# Altium PCB imu_evo.PcbDoc (part 2 of 2)
Units mil, origin at the board's own origin, x right, y up, seen from the top; angles counter-clockwise.
Board outline 2362.2 x 1574.8 mil, 3 copper layers (Top Layer, Mid-Layer 1, Bottom Layer); 55 components, 35 nets, 218 pads, 127 vias.
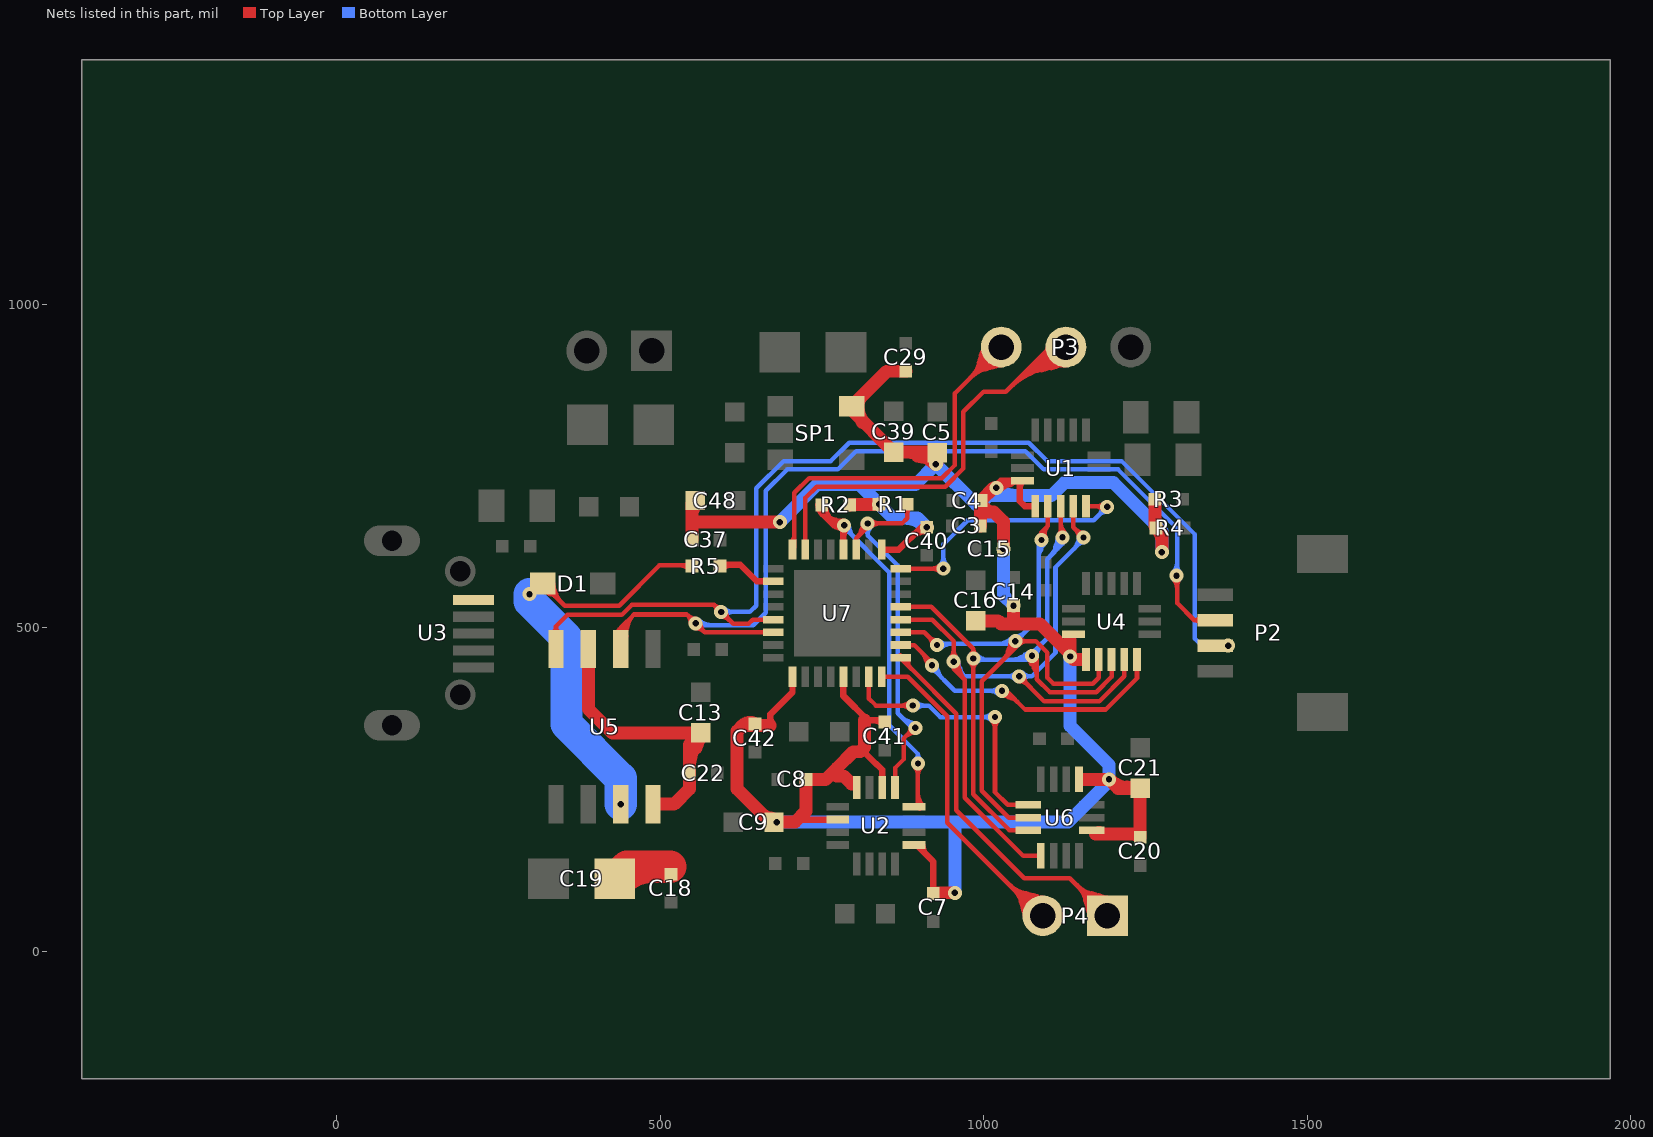
[diagram p2: the nets of this part, all layers, seen from the top]

## Via types
v1: diameter 21.65, hole 9.84, Top Layer to Bottom Layer, tented both sides, 119 vias
v2: diameter 196.85, hole 125.98, Top Layer to Bottom Layer, tented both sides, 4 vias
v3: diameter 21.65, hole 9.84, Top Layer to Bottom Layer, 3 vias
v4: diameter 118.11, hole 78.74, Top Layer to Bottom Layer, tented both sides, 1 vias

## Nets (pads, with @x,y where several pads share a name; then routed paths per layer and width w, separated by ;. In a path a pad name is that pad's centre, name@x,y a point inside that pad or via, vN(x,y) a via of type N, cw(c..) or ccw(c..) an arc to the next point about the centre after c; other vN are vias at no path point) (continued)
RX: P2.3 U5.2 U7.30 | length 2120.9
  Top Layer w7: U5.2@438.4,486.3 ccw(c420.39,511) 450.6,506.27 ; U5.2@439.17,467.52 439.17,500.2 ; 443.06,501.84 ccw(c458.61,499.4) U5.2@445.89,490.13 ; 545.18,516.63 ccw(c557.81,520.01) v1@555.18,507.21 ; 545.38,516.83 cw(c541.99,504.2) v1@554.8,506.82 ; v1@555.05,506.57 cw(c552.43,493.77) 565.06,497.15 ; v1@555.44,506.95 ccw(c568.24,509.58) 564.86,496.95 ; U7.30@675.2,493.11 568.9,493.11 v1(555.12,506.89) 541.34,520.67 459.65,520.67 ; v1(1298.29,580.74) 1299.21,579.82 1299.21,538.39 1325.79,511.81 ; P2.3@1369.09,511.81 1325.79,511.81 ; 439.17,500.2 cw(c429.86,500.2) 434.78,492.29 ccw(c429.86,500.2) 439.17,500.2 ; 439.17,500.2 ccw(c448.48,500.2) 443.56,492.29 cw(c448.48,500.2) 439.17,500.2 ; 439.17,500.2 459.65,520.67 ; 459.64,520.67 ccw(c489.69,490.62) 447.44,486.12 cw(c489.69,490.62) 459.64,520.67 ; 542.61,519.4 cw(c530.1,506.89) 547.79,506.89 ccw(c530.1,506.89) 542.61,519.4 ; 542.61,519.4 ccw(c555.12,531.9) 555.12,514.22 cw(c555.12,531.9) 542.61,519.4 ; 567.63,494.38 cw(c580.13,506.89) 562.45,506.89 ccw(c580.13,506.89) 567.63,494.38 ; 567.63,494.38 ccw(c555.12,481.87) 555.12,499.56 cw(c555.12,481.87) 567.63,494.38 ; 1325.79,511.81 cw(c1325.79,497.8) 1335.95,507.45 ccw(c1325.79,497.8) 1325.79,511.81 ; 1325.79,511.81 ccw(c1325.79,525.82) 1335.95,516.18 cw(c1325.79,525.82) 1325.79,511.81 ; U5.2@433.52,484.63 cw(c452.25,486.63) 438.93,499.95 ccw(c452.25,486.63) U5.2@433.52,484.63 ; U5.2@440.48,485.37 cw(c470.97,488.63) 449.29,510.31 ccw(c470.97,488.63) U5.2@440.48,485.37 ; v1@1293.11,575.56 cw(c1278.38,560.83) 1299.21,560.83 ccw(c1278.38,560.83) v1@1293.11,575.56 ; 1299.21,565.27 cw(c1313.76,565.27) 1303.47,575.56 ccw(c1313.76,565.27) 1299.21,565.27
  Bottom Layer w7: v1(555.12,506.89) 557.73,504.28 644.04,504.28 663.39,523.62 663.39,711.93 696.33,744.87 774.61,744.87 803.01,773.28 1064.63,773.28 1093.04,744.87 1207.9,744.87 1299.21,653.56 v1@1299.21,580.74 ; v1@560.3,501.71 cw(c566.51,495.5) 566.51,504.28 ccw(c566.51,495.5) v1@560.3,501.71 ; v1@560.3,512.07 ccw(c579.11,530.88) 579.11,504.28 cw(c579.11,530.88) v1@560.3,512.07 ; v1@1293.11,585.92 ccw(c1278.38,600.65) 1299.21,600.65 cw(c1278.38,600.65) v1@1293.11,585.92 ; 1299.21,596.2 ccw(c1313.76,596.2) 1303.47,585.92 cw(c1313.76,596.2) 1299.21,596.2
RX2: P4.1 U7.9 | length 1405.1
  Top Layer w7: U7.9@872.05,453.74 872.05,452.76 887.59,437.21 ; 1154.09,90.38 ccw(c1201.35,103.05) P4.1@1191.54,55.12 1133.49,113.16 1063.02,113.16 958.05,218.13 958.05,367.42 888.26,437.21 887.59,437.21 ; 1156.27,92.56 cw(c1143.61,45.3) P4.1@1191.54,55.12 ; 1157.02,79.44 ccw(c1198.81,90.64) P4.1@1190.13,48.26 ; 1159.95,68.5 ccw(c1196.27,78.23) P4.1@1188.73,41.4 ; 1167.21,89.63 cw(c1156.01,47.84) P4.1@1198.4,56.52 ; 1178.15,86.7 cw(c1168.42,50.39) P4.1@1205.25,57.93 ; 887.59,437.21 cw(c898.12,447.75) 884.15,452.91 ccw(c898.12,447.75) 887.59,437.21 ; 1143.74,102.91 cw(c1095.95,55.12) 1163.54,55.12 ccw(c1095.95,55.12) 1143.74,102.91 ; 1143.74,102.91 ccw(c1191.54,150.7) 1191.54,83.11 cw(c1191.54,150.7) 1143.74,102.91 ; 1155.69,90.96 cw(c1119.85,55.12) 1170.54,55.12 ccw(c1119.85,55.12) 1155.69,90.96 ; 1155.69,90.96 ccw(c1191.54,126.8) 1191.54,76.11 cw(c1191.54,126.8) 1155.69,90.96 ; P4.1@1167.64,79.01 cw(c1143.75,55.12) 1177.54,55.12 ccw(c1143.75,55.12) P4.1@1167.64,79.01 ; P4.1@1167.64,79.01 ccw(c1191.54,102.9) 1191.54,69.11 cw(c1191.54,102.9) P4.1@1167.64,79.01 ; U7.9@871.01,457.75 ccw(c875.53,456.08) 872.13,452.68 cw(c875.53,456.08) U7.9@871.01,457.75 ; U7.9@877.58,455.33 ccw(c886.83,451.92) 879.86,444.95 cw(c886.83,451.92) U7.9@877.58,455.33
SCL: R1.1 U2.1 U7.19 | length 960.7
  Top Layer w7: U7.19@803.15,621.06 803.15,638.78 820.87,656.5 v1(820.87,661.42) 874.02,661.42 881.89,669.29 R1.1@881.89,690.94 ; 810.11,648.62 cw(c828.33,643.74) v1@820.99,661.12 ; U2.1@863.19,252.95 863.19,283.46 876.97,297.24 876.97,329.72 892.72,345.47 v1(894.68,345.47) ; 883.72,335.21 ccw(c879.78,349.91) v1@894.37,345.57 ; 885.08,336.95 cw(c895.83,334.07) v1@894.72,345.15 ; 838.55,661.42 cw(c838.55,679.11) 826.05,666.6 ccw(c838.55,679.11) 838.55,661.42 ; 838.55,661.42 ccw(c838.55,643.73) 826.05,656.24 cw(c838.55,643.73) 838.55,661.42 ; 881.89,675.63 cw(c897.2,675.63) 886.37,686.46 ccw(c897.2,675.63) 881.89,675.63 ; 881.89,675.63 ccw(c866.58,675.63) 877.4,686.46 cw(c866.58,675.63) 881.89,675.63 ; 804.88,640.51 ccw(c783.97,661.42) 813.54,661.42 cw(c783.97,661.42) 804.88,640.51 ; 878.82,331.57 cw(c894.68,315.71) 894.68,338.15 ccw(c894.68,315.71) 878.82,331.57 ; 883.57,336.33 ccw(c874.42,345.47) 887.36,345.47 cw(c874.42,345.47) 883.57,336.33
  Bottom Layer w7: v1(820.87,661.42) 820.87,642.72 867.13,596.46 867.13,368.11 889.76,345.47 v1(894.68,345.47) ; 881.89,356.23 cw(c877.01,338.01) v1@894.38,345.35 ; 820.87,643.73 cw(c838.55,643.73) 826.05,656.24 ccw(c838.55,643.73) 820.87,643.73 ; 820.87,643.73 ccw(c803.18,643.73) 815.69,656.24 cw(c803.18,643.73) 820.87,643.73 ; 873.78,361.46 ccw(c894.68,382.37) 894.68,352.8 cw(c894.68,382.37) 873.78,361.46
SDA: R2.1 U2.16 U7.20 | length 1192.6
  Top Layer w7: U2.16@892.72,223.43 898.62,229.33 v1(898.62,290.35) ; 900.83,234.47 cw(c888.93,227.6) U2.16@902.2,224.05 ; 898.62,272.67 cw(c916.31,272.67) 903.8,285.17 ccw(c916.31,272.67) 898.62,272.67 ; 898.62,272.67 ccw(c880.93,272.67) 893.44,285.17 cw(c880.93,272.67) 898.62,272.67 ; U2.16@898.62,226.59 ccw(c907.69,226.59) 901.28,220.18 cw(c907.69,226.59) U2.16@898.62,226.59 ; 898.62,243.49 ccw(c924.59,243.49) 906.23,225.13 cw(c924.59,243.49) 898.62,243.49
  Top Layer w10: R2.1@747.58,685.77 cw(c733.75,661.81) 760.47,668.97 ; R2.1@750,689.96 750,677.17 ; 758.46,669.45 cw(c751.87,636.83) v1@779.59,655.24 ; U7.20@783.46,621.06 v1@783.46,653.54 ; v1(784.45,658.46) 768.7,658.46 750,677.17 ; 750,677.16 ccw(c781.32,708.48) 784.08,664.28 cw(c781.32,708.48) 750,677.16 ; 750,678.27 cw(c761.69,678.27) 753.42,686.54 ccw(c761.69,678.27) 750,678.27 ; 750,678.27 ccw(c738.31,678.27) 746.58,686.54 cw(c738.31,678.27) 750,678.27 ; 770.38,658.46 cw(c770.38,644.4) v1@780.33,654.34 ; 770.38,658.46 ccw(c770.38,672.53) 780.33,662.58 cw(c770.38,672.53) 770.38,658.46 ; 770.38,658.46 cw(c770.38,644.4) v1@780.33,654.34 ; v1@780.33,654.34 cw(c772.76,646.78) 783.46,646.78 ccw(c772.76,646.78) v1@780.33,654.34 ; R2.1@744.84,689.96 ccw(c763.28,689.96) 750.24,676.92 cw(c763.28,689.96) R2.1@744.84,689.96 ; R2.1@754.84,689.96 ccw(c797.43,689.96) 767.31,659.85 cw(c797.43,689.96) R2.1@754.84,689.96 ; 765.67,661.5 ccw(c783.16,678.99) 784.71,654.3 cw(c783.16,678.99) 765.67,661.5 ; 783.46,642.02 cw(c800.89,642.02) 788.57,654.34 ccw(c800.89,642.02) 783.46,642.02
  Bottom Layer w7: v1@784.34,658.16 cw(c778.85,642.46) 794.91,646.76 ; v1(784.45,658.46) 784.45,655.31 854.13,585.63 854.13,349.61 898.62,305.12 ; v1(898.62,290.35) 898.62,305.12 ; 898.62,305.12 cw(c887.41,305.12) 894.19,296.19 ccw(c887.41,305.12) 898.62,305.12 ; 898.62,305.12 ccw(c909.83,305.12) 903.05,296.19 cw(c909.83,305.12) 898.62,305.12 ; v1@784.45,651.14 cw(c784.45,641.07) 791.57,648.19 ccw(c784.45,641.07) v1@784.45,651.14 ; v1@791.78,658.46 ccw(c817.09,658.46) 799.19,640.57 cw(c817.09,658.46) v1@791.78,658.46
SPI-CS0: U1.5 U7.16 | length 637.5
  Top Layer w7: U7.16@872.05,591.54 v1(937.99,591.54) ; U1.5@1158.46,687.99 1191.93,687.99 v1(1190.95,687.01) ; 920.3,591.54 cw(c920.3,573.85) 932.81,586.35 ccw(c920.3,573.85) 920.3,591.54 ; 920.3,591.54 ccw(c920.3,609.22) 932.81,596.72 cw(c920.3,609.22) 920.3,591.54 ; 1170.89,687.99 cw(c1170.89,666.95) 1185.77,681.83 ccw(c1170.89,666.95) 1170.89,687.99 ; 1175.63,687.99 ccw(c1175.63,702.33) 1185.77,692.19 cw(c1175.63,702.33) 1175.63,687.99
  Bottom Layer w7: v1(937.99,591.54) 937.99,628.94 975.39,666.34 1170.28,666.34 v1(1190.95,687.01) ; 937.99,609.22 cw(c920.3,609.22) 932.81,596.72 ccw(c920.3,609.22) 937.99,609.22 ; 937.99,609.22 ccw(c955.68,609.22) 943.17,596.72 cw(c955.68,609.22) 937.99,609.22 ; 1178.44,674.5 cw(c1190.95,661.99) 1190.95,679.68 ccw(c1190.95,661.99) 1178.44,674.5 ; 1178.44,674.5 ccw(c1165.94,687.01) 1183.62,687.01 cw(c1165.94,687.01) 1178.44,674.5
SPI-CS1: U4.5 U7.10 | length 759.2
  Top Layer w7: U7.10@872.05,473.43 892.72,473.43 920.32,445.82 v1(920.32,441.95) ; 909.74,454.09 ccw(c926.65,458.63) v1@920.44,442.26 ; v1(1028.54,402.56) 1035.43,402.56 1064.18,373.81 1188.77,373.81 1237.21,422.24 U4.5@1237.21,450.79 ; v1@1028.84,402.7 ccw(c1048.14,412.3) 1042.56,391.48 ; 905.08,461.07 cw(c885.96,441.95) 912.99,441.95 ccw(c885.96,441.95) 905.08,461.07 ; 914.42,451.72 ccw(c920.32,457.62) 920.32,449.28 cw(c920.32,457.62) 914.42,451.72 ; v1@1028.54,395.23 cw(c1028.54,360.91) 1052.81,385.18 ccw(c1028.54,360.91) v1@1028.54,395.23 ; v1@1028.54,402.23 cw(c1028.54,384.81) 1040.86,397.13 ccw(c1028.54,384.81) v1@1028.54,402.23
  Bottom Layer w7: v1@920.2,441.65 cw(c913.85,425.15) 930.92,429.73 ; v1@920.25,441.95 v1(920.32,441.95) 920.32,437.95 955.71,402.56 v1(1028.54,402.56) ; 1010.86,402.56 cw(c1010.86,384.87) 1023.36,397.38 ccw(c1010.86,384.87) 1010.86,402.56 ; 1010.86,402.56 ccw(c1010.86,420.25) 1023.36,407.74 cw(c1010.86,420.25) 1010.86,402.56 ; v1@920.32,434.62 cw(c920.32,426.6) 925.99,432.27 ccw(c920.32,426.6) v1@920.32,434.62 ; v1@927.65,441.95 ccw(c955,441.95) 935.66,422.61 cw(c955,441.95) v1@927.65,441.95
SPI-CS2: U6.12 U7.7 | length 641.8
  Top Layer w7: U7.7@822.83,424.21 822.83,390.75 833.66,379.92 v1(890.75,379.92) ; v1(1017.72,362.2) 1017.72,246.1 1037.44,226.38 U6.12@1068.9,226.38 ; 873.06,379.92 cw(c873.06,362.23) 885.57,374.74 ccw(c873.06,362.23) 873.06,379.92 ; 873.06,379.92 ccw(c873.06,397.61) 885.57,385.1 cw(c873.06,397.61) 873.06,379.92 ; 1017.72,344.52 cw(c1035.4,344.52) 1022.9,357.02 ccw(c1035.4,344.52) 1017.72,344.52 ; 1017.72,344.52 ccw(c1000.03,344.52) 1012.54,357.02 cw(c1000.03,344.52) 1017.72,344.52
  Bottom Layer w7: v1@886.81,379.92 915.35,379.92 933.07,362.2 v1(1017.72,362.2) ; 908.44,379.92 cw(c908.44,397.61) 895.93,385.1 ccw(c908.44,397.61) 908.44,379.92 ; 908.44,379.92 ccw(c908.44,362.23) 895.93,374.74 cw(c908.44,362.23) 908.44,379.92 ; 1000.03,362.2 cw(c1000.03,344.52) 1012.54,357.02 ccw(c1000.03,344.52) 1000.03,362.2 ; 1000.03,362.2 ccw(c1000.03,379.89) 1012.54,367.39 cw(c1000.03,379.89) 1000.03,362.2
SPI-MISO: U1.4 U4.4 U6.1 U7.12 | length 1787.2
  Top Layer w7: U7.12@872.05,512.8 920.59,512.8 953.74,479.65 v1(953.74,447.83) 953.74,437.01 971.05,419.7 ; v1@951.66,440.81 cw(c949.82,434.6) 956.2,435.73 cw(c963.14,436.95) v1@958.53,442.29 ; v1@953.55,447.57 cw(c939.24,427.13) 963.81,431.46 ; v1@1055.05,424.88 cw(c1052.43,412.07) 1065.06,415.46 ; v1(1055.12,425.2) 1093.5,386.81 1179.13,386.81 1217.52,425.2 U4.4@1217.52,450.79 ; v1@1055.44,425.26 ccw(c1068.24,427.88) 1064.86,415.26 ; U6.1@1088.58,147.64 1061.02,147.64 971.05,237.61 971.05,419.7 ; U1.4@1138.78,687.99 1138.78,655.51 v1(1154.53,639.76) ; 1144.59,649.51 ccw(c1157.22,652.89) v1@1154.59,640.08 ; 1144.79,649.7 cw(c1141.4,637.08) v1@1154.21,639.7 ; 953.74,465.52 cw(c936.05,465.52) 948.56,453.02 ccw(c936.05,465.52) 953.74,465.52 ; 953.74,465.52 ccw(c971.43,465.52) 958.92,453.02 cw(c971.43,465.52) 953.74,465.52 ; 971.05,419.7 cw(c995.52,444.18) 961.04,447.2 ccw(c995.52,444.18) 971.05,419.7 ; 1067.63,412.69 cw(c1080.13,425.2) 1062.44,425.2 ccw(c1080.13,425.2) 1067.63,412.69 ; 1067.63,412.69 ccw(c1055.12,400.18) 1055.12,417.87 cw(c1055.12,400.18) 1067.63,412.69 ; 1142.02,652.27 cw(c1129.51,639.76) 1147.2,639.76 ccw(c1129.51,639.76) 1142.02,652.27 ; 1142.02,652.27 ccw(c1154.53,664.78) 1154.53,647.09 cw(c1154.53,664.78) 1142.02,652.27 ; v1@954.07,447.81 ccw(c976,445.89) 960.43,430.32 cw(c976,445.89) v1@954.07,447.81
  Bottom Layer w7: v1@953.6,447.54 cw(c945.17,429.21) 964.66,434.43 ; v1(953.74,447.83) 953.74,441.93 970.47,425.2 v1(1055.12,425.2) 1074.8,425.2 1111.22,461.61 1111.22,593.5 1154.53,636.81 v1(1154.53,639.76) ; 1144.1,628.19 cw(c1159.92,623.95) v1@1154.63,639.45 ; 1037.43,425.2 cw(c1037.43,407.51) 1049.94,420.02 ccw(c1037.43,407.51) 1037.43,425.2 ; 1037.43,425.2 ccw(c1037.43,442.89) 1049.94,430.38 cw(c1037.43,442.89) 1037.43,425.2 ; 1072.81,425.2 cw(c1072.81,442.89) 1060.3,430.38 ccw(c1072.81,442.89) 1072.81,425.2 ; 1072.81,425.2 ccw(c1072.81,407.51) 1060.3,420.02 cw(c1072.81,407.51) 1072.81,425.2 ; v1@954.07,447.83 ccw(c969.11,447.83) 958.47,437.2 cw(c969.11,447.83) v1@954.07,447.83 ; v1@961.07,447.83 ccw(c993.01,447.83) 970.42,425.25 cw(c993.01,447.83) v1@961.07,447.83 ; 1139.93,622.22 ccw(c1122.38,639.76) 1147.2,639.76 cw(c1122.38,639.76) 1139.93,622.22 ; 1147.06,629.34 cw(c1154.53,621.88) 1154.53,632.44 ccw(c1154.53,621.88) 1147.06,629.34
SPI-MOSI: U1.3 U4.3 U6.14 U7.13 | length 1714.1
  Top Layer w7: U7.13@872.05,532.48 919.29,532.48 984.25,467.52 ; U6.14@1068.9,187.01 1040.04,187.01 984.05,243 984.05,452.55 v1(984.25,452.76) 984.25,467.52 ; v1@1073.89,457.68 v1(1074.86,456.72) 1076.75,456.72 1082.47,450.99 1082.47,420.8 1102.68,400.59 1174.21,400.59 1197.83,424.21 U4.3@1197.83,450.79 ; 1073.98,444.08 cw(c1083.35,449.49) v1@1075.1,456.5 ; v1@1074.08,449.43 cw(c1073.06,439.78) 1081.47,444.63 cw(c1089.18,449.08) v1@1081.32,453.27 ; 1078.94,435.49 cw(c1091.38,442.67) v1@1080.44,451.97 ; U1.3@1119.09,687.99 1119.09,642.8 v1(1122.1,639.8) ; 984.25,467.52 cw(c973.04,467.52) 979.82,458.59 ccw(c973.04,467.52) 984.25,467.52 ; 984.25,467.52 ccw(c995.46,467.52) 988.68,458.59 cw(c995.46,467.52) 984.25,467.52 ; v1@979.07,447.58 cw(c967.06,435.56) 984.05,435.56 ccw(c967.06,435.56) v1@979.07,447.58 ; 984.05,434.57 cw(c1002.43,434.57) 989.43,447.58 ccw(c1002.43,434.57) 984.05,434.57 ; v1@1069.67,451.53 cw(c1038.78,420.64) 1082.47,420.64 ccw(c1038.78,420.64) v1@1069.67,451.53 ; v1@1074.62,456.48 cw(c1055.68,437.54) 1082.47,437.54 ccw(c1055.68,437.54) v1@1074.62,456.48 ; v1@1116.92,644.98 ccw(c1111.68,650.22) 1119.09,650.22 cw(c1111.68,650.22) v1@1116.92,644.98 ; 1119.09,664.75 ccw(c1147.05,664.75) 1127.28,644.98 cw(c1147.05,664.75) 1119.09,664.75
  Bottom Layer w7: v1@986.22,450.79 1067,450.79 v1@1073.89,457.68 ; 1056.21,454.12 cw(c1061.43,445.09) v1@1069.32,451.92 ; 1063.55,458.36 cw(c1067.95,450.74) v1@1074.61,456.5 ; v1@1072.87,458.7 1098.22,484.05 1098.22,606.09 1122.1,629.98 v1(1122.1,639.8) ; v1@1074.74,457.02 ccw(c1068.42,473.48) 1085.45,468.92 ; 1110.64,624.36 cw(c1134.74,617.9) v1@1122.27,639.51 ; v1@1116.54,635.03 cw(c1109.84,629.3) 1118.35,627.02 cw(c1126.16,624.93) v1@1124.03,632.73 ; v1@989.43,447.58 cw(c997.19,439.82) 997.19,450.79 ccw(c997.19,439.82) v1@989.43,447.58 ; v1@989.43,457.94 ccw(c1006.69,475.2) 1006.69,450.79 cw(c1006.69,475.2) v1@989.43,457.94 ; 1042.86,450.79 ccw(c1042.86,488.71) 1069.67,461.9 cw(c1042.86,488.71) 1042.86,450.79 ; 1059.76,450.79 ccw(c1059.76,471.81) 1074.62,456.95 cw(c1059.76,471.81) 1059.76,450.79 ; v1@1074.86,464.04 ccw(c1074.86,472.15) 1080.59,466.42 cw(c1074.86,472.15) v1@1074.86,464.04 ; v1@1082.18,456.72 cw(c1109.45,456.72) 1090.17,476 ccw(c1109.45,456.72) v1@1082.18,456.72 ; 1102.65,610.53 ccw(c1073.38,639.8) 1114.78,639.8 cw(c1073.38,639.8) 1102.65,610.53 ; 1114.6,622.48 ccw(c1097.28,639.8) 1121.78,639.8 cw(c1097.28,639.8) 1114.6,622.48
SPI-SCK: U1.2 U4.2 U6.13 U7.11 | length 1614
  Top Layer w7: U7.11@872.05,493.11 908.47,493.11 v1(928.15,473.43) ; 918.21,483.17 ccw(c930.84,486.55) v1@928.22,473.75 ; 918.41,483.36 cw(c915.03,470.74) v1@927.83,473.36 ; 1037.75,463.9 cw(c1061.85,457.44) v1@1049.38,479.05 ; v1@1043.64,474.58 cw(c1036.89,468.82) 1045.46,466.53 cw(c1053.31,464.42) v1@1051.16,472.27 ; U6.13@1068.9,206.69 1038.74,206.69 997.05,248.38 997.05,417.32 1059.06,479.33 1080.99,479.33 1098.43,461.89 1098.43,423.23 1108.06,413.59 1168.83,413.59 1178.15,422.91 U4.2@1178.15,450.79 ; v1(1089.57,635.83) 1089.57,647.64 ; U1.2@1099.41,687.99 1099.41,657.48 ; 915.64,485.93 cw(c903.13,473.43) 920.82,473.43 ccw(c903.13,473.43) 915.64,485.93 ; 915.64,485.93 ccw(c928.15,498.44) 928.15,480.75 cw(c928.15,498.44) 915.64,485.93 ; 1066.9,479.33 cw(c1066.9,497.02) 1054.39,484.51 ccw(c1066.9,497.02) 1066.9,479.33 ; 1066.9,479.33 ccw(c1066.9,461.64) 1054.39,474.15 cw(c1066.9,461.64) 1066.9,479.33 ; 1089.57,647.64 cw(c1083.71,647.64) 1086.31,642.39 ccw(c1083.71,647.64) 1089.57,647.64 ; 1089.57,647.64 ccw(c1095.42,647.64) 1092.82,642.39 cw(c1095.42,647.64) 1089.57,647.64 ; 1089.57,647.64 1099.41,657.48 ; 1099.41,657.48 ccw(c1110.96,645.93) 1096.19,638.96 cw(c1110.96,645.93) 1099.41,657.48 ; 1029.75,450.02 ccw(c1000.44,479.33) 1041.89,479.33 cw(c1000.44,479.33) 1029.75,450.02 ; 1041.7,461.97 ccw(c1024.34,479.33) 1048.89,479.33 cw(c1024.34,479.33) 1041.7,461.97 ; v1@1089.86,635.97 cw(c1101.41,641.42) 1092.38,650.45 ccw(c1101.41,641.42) v1@1089.86,635.97
  Bottom Layer w7: v1(928.15,473.43) 930.12,475.39 1045.91,475.39 1085.22,514.71 1085.22,631.48 v1(1089.57,635.83) ; v1@1085.8,629.54 cw(c1082.03,623.26) 1088.37,619.6 ; v1@933.33,468.24 cw(c950.59,450.98) 950.59,475.39 ccw(c950.59,450.98) v1@933.33,468.24 ; v1@933.33,478.61 ccw(c941.09,486.36) 941.09,475.39 cw(c941.09,486.36) v1@933.33,478.61 ; 1022.02,475.39 ccw(c1022.02,506.52) 1044.03,484.51 cw(c1022.02,506.52) 1022.02,475.39 ; 1038.92,475.39 ccw(c1038.92,489.62) 1048.98,479.56 cw(c1038.92,489.62) 1038.92,475.39 ; v1@1049.21,486.66 ccw(c1049.21,505.87) 1062.8,492.29 cw(c1049.21,505.87) v1@1049.21,486.66 ; v1@1056.54,479.33 cw(c1072.7,479.33) 1061.27,490.76 ccw(c1072.7,479.33) v1@1056.54,479.33 ; 1085.22,607.65 cw(c1117.75,607.65) 1094.75,630.65 ccw(c1117.75,607.65) 1085.22,607.65 ; 1085.22,624.54 cw(c1100.85,624.54) 1089.8,635.6 ccw(c1100.85,624.54) 1085.22,624.54
  Bottom Layer w9.84: v1@1087.6,633.86 v1(1089.57,635.83)
  other v1: 1049.21,479.33
SWCLK: P3.3 U7.24 | length 1437.4
  Top Layer w7: U7.24@704.72,621.06 707.68,624.02 707.68,708.66 730.32,731.3 935.36,731.3 955.77,751.71 955.77,862.46 P3.3@1027.36,934.06 ; 706.46,638.57 ccw(c711.59,635.61) U7.24@706.71,632.27 ; 989.92,898.79 cw(c1037.18,886.13) P3.3@1027.36,934.06 ; 992.1,896.61 ccw(c979.43,943.87) P3.3@1027.36,934.06 ; 992.85,909.73 cw(c1034.64,898.53) P3.3@1025.96,940.92 ; 995.78,920.67 cw(c1032.1,910.94) P3.3@1024.55,947.77 ; 1000.51,912.2 cw(c1029.06,904.56) P3.3@1027.36,934.06 ; 1003.04,899.54 ccw(c991.84,941.33) P3.3@1034.22,932.65 ; 1005.51,907.2 ccw(c997.86,935.75) P3.3@1027.36,934.06 ; 1013.98,902.47 ccw(c1004.25,938.79) P3.3@1041.08,931.25 ; 979.57,886.26 cw(c1027.36,838.47) 1027.36,906.06 ccw(c1027.36,838.47) 979.57,886.26 ; 979.57,886.26 ccw(c931.78,934.06) 999.37,934.06 cw(c931.78,934.06) 979.57,886.26 ; 991.52,898.21 cw(c1027.36,862.37) 1027.36,913.06 ccw(c1027.36,862.37) 991.52,898.21 ; 991.52,898.21 ccw(c955.68,934.06) 1006.37,934.06 cw(c955.68,934.06) 991.52,898.21 ; 1003.47,910.16 cw(c1027.36,886.27) 1027.36,920.06 ccw(c1027.36,886.27) 1003.47,910.16 ; 1003.47,910.16 ccw(c979.58,934.06) 1013.37,934.06 cw(c979.58,934.06) 1003.47,910.16 ; U7.24@703.02,632.61 ccw(c691.79,643.84) 707.68,643.84 cw(c691.79,643.84) U7.24@703.02,632.61
SWDIO: P3.2 U7.23 | length 1848.4
  Top Layer w7: U7.23@724.41,621.06 724.41,700.79 741.92,718.3 940.74,718.3 968.77,746.33 968.77,833.93 1000,865.16 1034.45,865.16 1103.35,934.06 P3.2@1127.36,934.06 ; 1074.72,895.22 ccw(c1058.98,971.66) P3.2@1127.36,934.06 ; 1079.62,901.09 ccw(c1064.89,959.88) P3.2@1120.9,936.73 ; 1083.14,908.21 ccw(c1071.73,950.82) P3.2@1113.96,938.09 ; 1088.79,916.72 ccw(c1082.51,940.17) P3.2@1106.56,936.89 ; 1089.57,898.28 ccw(c1076.44,962.06) P3.2@1133.5,930.68 ; 1093.1,904.47 ccw(c1080.87,953.28) P3.2@1127.36,934.06 ; 1095.28,911.46 ccw(c1085.88,946.55) P3.2@1120.66,936.07 ; 1095.91,918.63 cw(c1103.06,891.96) P3.2@1116.87,915.87 ; 1097.1,911.95 cw(c1102.65,891.25) P3.2@1113.36,909.81 ; 1098.96,919.45 ccw(c1093.82,938.63) P3.2@1113.5,935.94 ; 1104.43,901.34 ccw(c1093.9,952.46) P3.2@1139.63,927.31 ; 1106.58,907.85 ccw(c1096.85,946.67) P3.2@1133.84,931.38 ; P3.2@1127.36,934.06 ccw(c1127.36,876.09) 1086.37,917.08 cw(c1127.36,876.09) P3.2@1127.36,934.06 ; 1038.57,869.28 cw(c1127.36,780.49) 1127.36,906.06 ccw(c1127.36,780.49) 1038.57,869.28 ; 1050.52,881.23 cw(c1127.36,804.39) 1127.36,913.06 ccw(c1127.36,804.39) 1050.52,881.23 ; 1062.47,893.18 cw(c1127.36,828.29) 1127.36,920.06 ccw(c1127.36,828.29) 1062.47,893.18 ; 1074.42,905.13 cw(c1127.36,852.19) 1127.36,927.06 ccw(c1127.36,852.19) 1074.42,905.13 ; 1096.55,927.26 ccw(c1089.76,934.06) 1099.37,934.06 cw(c1089.76,934.06) 1096.55,927.26
TX: P2.2 U5.4 U7.29 | length 1911.3
  Top Layer w7: U5.4@339.17,467.52 339.17,502.56 ; v1@594.42,524.29 cw(c591.8,511.48) 604.43,514.86 ; v1@594.81,524.67 ccw(c607.61,527.29) 604.23,514.67 ; U7.29@675.2,512.8 643.47,512.8 636.78,506.11 612.98,506.11 v1(594.49,524.61) 583.66,535.43 ; 339.17,502.56 cw(c325.28,502.56) 333.97,491.72 ccw(c325.28,502.56) 339.17,502.56 ; 339.17,502.56 ccw(c353.07,502.56) 344.37,491.72 cw(c353.07,502.56) 339.17,502.56 ; 339.17,502.56 356.56,519.95 440.54,519.95 456.02,535.43 583.66,535.43 ; 583.66,535.43 cw(c574.94,526.71) 587.2,525.39 ccw(c574.94,526.71) 583.66,535.43 ; 583.66,535.43 ccw(c592.38,544.15) 593.7,531.89 cw(c592.38,544.15) 583.66,535.43 ; 607,512.1 cw(c619.5,524.61) 601.81,524.61 ccw(c619.5,524.61) 607,512.1 ; 607,512.1 ccw(c594.49,499.59) 594.49,517.28 cw(c594.49,499.59) 607,512.1
  Bottom Layer w7: v1(594.49,524.61) 638.78,524.61 648.62,534.45 648.62,715.55 690.94,757.87 763.78,757.87 792.19,786.28 1070.02,786.28 1098.43,757.87 1213.28,757.87 1326.77,644.39 1326.77,483.27 1337.6,472.44 v1(1377.95,472.44) ; 612.18,524.61 cw(c612.18,542.29) 599.67,529.79 ccw(c612.18,542.29) 612.18,524.61 ; 612.18,524.61 ccw(c612.18,506.92) 599.67,519.43 cw(c612.18,506.92) 612.18,524.61 ; 1360.26,472.44 cw(c1360.26,454.75) 1372.77,467.26 ccw(c1360.26,454.75) 1360.26,472.44 ; 1360.26,472.44 ccw(c1360.26,490.13) 1372.77,477.62 cw(c1360.26,490.13) 1360.26,472.44
TX2: P4.2 U7.8 | length 1247.1
  Top Layer w7: U7.8@842.52,424.21 882.87,424.21 943.9,363.19 943.9,198.82 1087.6,55.12 P4.2@1091.54,55.12 cw(c1091.1,81.91) 1065.22,74.97 ; 1053.94,93.19 cw(c1040.23,42.05) P4.2@1091.54,55.12 ccw(c1059.27,51.1) 1067.69,82.5 ; 1057.49,77.71 ccw(c1096.55,88.18) P4.2@1090.48,48.19 ; 1060.26,67.37 ccw(c1094.8,76.63) P4.2@1089.43,41.27 ; 1065.48,90.1 cw(c1053.51,45.43) P4.2@1098.32,56.85 ; 1077.03,87 cw(c1066.8,48.82) P4.2@1105.11,58.58 ; 1037.02,105.69 ccw(c1091.54,160.21) 1091.54,83.11 cw(c1091.54,160.21) 1037.02,105.69 ; 1046.53,96.19 cw(c1005.46,55.12) 1063.54,55.12 ccw(c1005.46,55.12) 1046.53,96.19 ; 1048.97,93.75 ccw(c1091.54,136.31) 1091.54,76.11 cw(c1091.54,136.31) 1048.97,93.75 ; 1058.48,84.24 cw(c1029.36,55.12) 1070.54,55.12 ccw(c1029.36,55.12) 1058.48,84.24 ; 1060.92,81.8 ccw(c1091.54,112.41) 1091.54,69.11 cw(c1091.54,112.41) 1060.92,81.8
VBUS: C18.1 C19.1 D1.1 R5.2 U3.1 U5.7 | length 1495.3
  Top Layer w7: D1.1@320.29,556.18 cw(c314.87,516.98) 347.44,539.46 ; D1.1@320.89,567.98 ccw(c337.65,567.08) D1.1@331.13,551.61 ; D1.1@320.9,568.74 ccw(c341.77,571.6) 336.31,551.25 ; D1.1@321.25,563.11 cw(c317.82,538.34) 338.4,552.55 ; D1.1@322.36,569.03 cw(c315.94,545.91) 339.12,552.12 ; D1.1@322.38,570.01 cw(c315.47,546.79) 338.87,553.06 ; D1.1@322.47,569.98 cw(c312.76,545.21) 338.77,550.79 ; D1.1@325.28,556.47 cw(c328.56,543.85) 339.29,551.26 ; D1.1@326.58,564.96 326.58,560.72 352.85,534.45 436.66,534.45 498.66,596.46 R5.2@550.2,596.46 ; D1.1@327.88,567.6 ccw(c348.22,566.51) 340.31,547.74 ; D1.1@322.36,569.03 cw(c315.63,545.24) 339.51,551.64 ; D1.1@322.36,569.03 cw(c315.63,545.24) 339.51,551.64 ; D1.1@322.36,569.03 cw(c315.63,545.24) 339.51,551.64 ; D1.1@322.05,555.08 cw(c322.05,530.51) 339.42,547.88 ccw(c322.05,530.51) D1.1@322.05,555.08 ; D1.1@322.05,556.06 cw(c322.05,533.86) 337.74,549.56 ccw(c322.05,533.86) D1.1@322.05,556.06 ; D1.1@327.88,568.9 ccw(c350.78,568.9) 334.59,552.71 cw(c350.78,568.9) D1.1@327.88,568.9 ; D1.1@327.89,567.91 ccw(c348.41,567.91) 333.9,553.4 cw(c348.41,567.91) D1.1@327.89,567.91 ; D1.1@334.67,566.58 ccw(c351.16,563.57) 337.37,554.05 cw(c351.16,563.57) D1.1@334.67,566.58 ; D1.1@334.88,568.9 ccw(c374.68,568.9) 346.54,540.76 cw(c374.68,568.9) D1.1@334.88,568.9 ; D1.1@334.89,567.91 ccw(c372.31,567.91) 345.85,541.45 cw(c372.31,567.91) D1.1@334.89,567.91 ; 531.52,596.46 cw(c531.52,577.78) 544.73,590.99 ccw(c531.52,577.78) 531.52,596.46 ; 536.28,596.46 ccw(c536.28,608.41) 544.73,599.96 cw(c536.28,608.41) 536.28,596.46
  Top Layer w50: C19.1@430.12,112.2 448.82,130.91 515.75,130.91 ; C19.1@434.71,107.61 cw(c490.95,51.37) 490.95,130.91 ccw(c490.95,51.37) C19.1@434.71,107.61
  Bottom Layer w50: v1(298.23,552.17) 298.23,541.34 355.32,484.25 355.32,351.38 439.17,267.52 v1(439.17,227.52)
VBUS_DEC: R5.1 U7.26 | length 121.2
  Top Layer w10: R5.1@593.5,597.44 624.02,597.44 649.61,571.85 U7.26@675.2,571.85 ; R5.1@595.94,592.05 cw(c608.96,579.03) 608.96,597.44 ccw(c608.96,579.03) R5.1@595.94,592.05
VDD: C3.1 C4.1 C5.2 C7.1 C8.1 C9.2 C14.1 C15.1 C16.2 C20.1 C21.2 C29.2 C37.2 C39.1 C40.1 C41.1 C42.1 C48.1 R1.2 R2.2 R3.1 R4.1 SP1.5 U1.1 U1.16 U2.2 U2.4 U2.6 U2.13 U4.1 U4.16 U6.5 U6.8 U7.1 U7.5 U7.17 | length 5613
  Top Layer w10: 666.85,352.83 ccw(c658.58,361.1) 670.28,361.1 ccw(c681.97,361.1) 673.7,352.83 ; 670.28,349.41 670.28,366.14 704.72,400.59 U7.1@704.72,424.21 ; 713.58,203.74 U2.6@774.61,203.74 ; 773.62,270.67 773.62,283.46 ; U7.5@783.46,424.21 783.46,394.69 820.87,357.28 ; 815.94,315.48 817.91,313.52 817.91,305.31 834.03,289.2 834.82,289.2 843.5,280.51 U2.2@843.5,252.95 ; 815.94,357.28 839.57,357.28 C41.1@843.5,353.35 ; U7.17@842.52,621.06 869.1,621.06 903.54,655.51 v1(912.4,655.51) ; 891.41,645.05 ccw(c884.25,671.76) C40.1@908.21,657.93 ; U2.13@892.72,164.37 896.65,164.37 922.24,138.78 C7.1@922.24,89.57 ; 898.08,647.81 cw(c905.84,640.05) C40.1@910.12,650.15 ; v1@1021.66,722.02 ccw(c1030.63,746.92) U1.16@1043.87,724 ; v1@1025.48,717.15 cw(c1036.19,718.28) 1030.8,727.61 ; 1026.58,727.36 U1.16@1060.04,727.36 1056.1,723.42 1056.1,695.87 1063.98,687.99 U1.1@1079.72,687.99 ; 1039.86,722 ccw(c1036.63,734.06) U1.16@1047.44,727.81 ; 922.24,101.26 cw(c910.55,101.26) 918.82,92.99 ccw(c910.55,101.26) 922.24,101.26 ; 922.24,101.26 ccw(c933.93,101.26) 925.67,92.99 cw(c933.93,101.26) 922.24,101.26 ; 828.62,357.28 cw(c828.62,335.51) 844.02,350.91 ccw(c828.62,335.51) 828.62,357.28 ; 887.33,639.3 cw(c912.4,614.23) 912.4,649.69 ccw(c912.4,614.23) 887.33,639.3 ; 889.01,640.98 cw(c912.4,617.59) 912.4,650.67 ccw(c912.4,617.59) 889.01,640.98 ; U2.13@905.43,164.37 ccw(c926.62,164.37) 911.64,149.39 cw(c926.62,164.37) U2.13@905.43,164.37 ; v1@1016.73,719.49 cw(c1035.75,700.47) 1035.75,727.36 ccw(c1035.75,700.47) v1@1016.73,719.49 ; v1@1023.81,712.42 cw(c1059.89,676.33) 1059.89,727.36 ccw(c1059.89,676.33) v1@1023.81,712.42 ; 1056.1,715.67 cw(c1071.73,715.67) 1060.68,726.72 ccw(c1071.73,715.67) 1056.1,715.67
  Top Layer w20: C37.2@549.21,635.83 549.21,663.39 ; C48.1@554.13,696.85 549.21,691.93 549.21,663.39 ; 670.28,349.41 627.95,349.41 ; C9.2@678.15,201.77 v1(680.12,199.8) ; v1(685.04,663.39) 549.21,663.39 ; C8.1@725.39,265.75 725.39,216.53 708.66,199.8 C9.2@676.18,199.8 670.28,199.8 619.09,250.98 619.09,340.55 ; 737.2,265.75 755.91,265.75 773.62,283.46 798.73,308.57 809.03,308.57 815.94,315.48 815.94,357.28 ; 773.62,270.67 784.2,270.67 796.13,258.73 ; R2.2@793.31,689.96 794.29,690.94 v1(838.58,690.94) ; SP1.5@797.32,837.54 cw(c780.91,809.11) 812.62,817.61 ; C29.2@879.92,896.65 850.39,896.65 SP1.5@796.26,842.52 796.26,836.61 C39.1@861.22,771.65 927.16,771.65 C5.2@928.15,770.67 928.15,754.92 v1(926.18,752.95) ; 897.68,765.6 ccw(c905.14,788.56) C5.2@924.2,773.74 ; C7.1@922.24,89.57 923.22,90.55 v1(955.71,90.55) ; C16.2@988.19,510.83 1022.64,510.83 1027.31,506.16 1087.36,506.16 1133.86,459.66 1133.86,481.3 ; C3.1@995.08,657.48 995.08,679.13 ; v1@1015.75,716.54 C4.1@996.06,696.85 995.08,695.86 995.08,679.13 ; v1(1030.51,622.05) 1030.51,664.37 1015.75,679.13 ; 1043.31,507.14 1046.26,510.1 v1(1046.26,534.45) ; v1@1138.78,450.79 1153.54,450.79 U4.1@1154.53,451.77 ; U6.8@1151.57,265.75 v1(1193.9,265.75) 1207.68,251.97 C21.2@1242.13,251.97 C20.1@1242.13,176.18 1237.2,181.1 U6.5@1173.23,181.1 ; 1221.77,253.95 ccw(c1227.86,276.68) C21.2@1239.63,256.3 ; R3.1@1264.76,698.82 1264.76,656.5 R4.1@1266.73,654.53 1275.59,645.67 v1(1275.59,617.13) ; 619.1,340.55 cw(c645.64,314) 646.66,351.54 ccw(c645.64,314) 619.1,340.55 ; 619.09,340.55 627.95,349.41 ; 627.95,349.41 cw(c638.66,338.7) 646.74,351.51 ccw(c638.66,338.7) 627.95,349.41 ; C9.2@670.29,206.38 cw(c666.41,191.89) C9.2@679.4,199.39 ; C9.2@670.29,206.38 cw(c666.41,191.89) C9.2@679.4,199.39 ; C9.2@670.29,206.38 cw(c666.41,191.89) C9.2@679.4,199.39 ; SP1.5@805.94,842.52 ccw(c843.58,842.52) 816.97,815.91 cw(c843.58,842.52) SP1.5@805.94,842.52 ; SP1.5@805.94,842.52 cw(c829.33,842.52) 812.79,859.05 ccw(c829.33,842.52) SP1.5@805.94,842.52 ; 995.08,679.13 1015.75,679.13 ; 1015.75,679.13 cw(c1015.75,699.1) 995.91,696.83 ccw(c1015.75,699.1) 1015.75,679.13 ; 549.21,672.9 cw(c578.09,672.9) 557.67,693.31 ccw(c578.09,672.9) 549.21,672.9 ; 657.56,212.51 ccw(c676.18,231.13) 676.18,204.8 cw(c676.18,231.13) 657.56,212.51 ; C9.2@661.9,208.17 ccw(c680.12,226.39) 680.12,200.63 cw(c680.12,226.39) C9.2@661.9,208.17 ; 879.04,771.65 cw(c879.04,705.81) 925.6,752.37 ccw(c879.04,705.81) 879.04,771.65 ; v1@1134.44,456.29 ccw(c1147.73,469.58) 1147.73,450.79 cw(c1147.73,469.58) v1@1134.44,456.29 ; U6.5@1178.21,184.11 ccw(c1185.47,191.38) 1185.47,181.1 cw(c1185.47,191.38) U6.5@1178.21,184.11 ; v1@1194.48,266.33 ccw(c1229.16,301.01) 1229.16,251.97 cw(c1229.16,301.01) v1@1194.48,266.33 ; 1230.63,181.1 cw(c1230.63,164.68) 1242.24,176.29 ccw(c1230.63,164.68) 1230.63,181.1 ; R4.1@1266.84,654.64 cw(c1245.72,633.52) 1275.59,633.52 ccw(c1245.72,633.52) R4.1@1266.84,654.64
  Bottom Layer w20: v1(680.12,199.8) 1130.91,199.8 1193.9,262.8 v1(1193.9,265.75) 1193.9,288.39 1133.86,348.43 v1(1133.86,455.71) ; v1(685.04,663.39) 743.11,721.46 808.07,721.46 ; v1(912.4,655.51) 898.13,669.78 859.74,669.78 v1(838.58,690.94) 808.07,721.46 ; v1(955.71,90.55) 955.71,197.83 ; v1(1030.51,622.05) 1030.51,550.2 v1(1046.26,534.45) ; v1(1275.59,617.13) 1275.59,649.61 1200.79,724.41 1125.02,724.41 1105.33,704.72 1007.87,704.72 994.09,690.94 988.19,690.94 v1(926.18,752.95) 894.68,721.46 808.07,721.46 ; 875.95,669.78 cw(c875.95,619.06) 911.82,654.93 ccw(c875.95,619.06) 875.95,669.78 ; v1@1020.27,717.12 ccw(c1050.2,747.05) 1050.2,704.72 cw(c1050.2,747.05) v1@1020.27,717.12
  other v1: 1019.68,716.54
VDDIO: C13.2 C22.1 U5.3 U5.8 | length 637.7
  Top Layer w20: U5.3@389.17,467.52 389.17,374.61 426.18,337.6 C13.2@562.99,337.6 545.28,319.88 C22.1@545.28,275.59 545.28,250.98 521.81,227.52 U5.8@489.17,227.52 ; 555.31,314.63 ccw(c530.57,328.91) C13.2@558.16,336.31 ; C22.1@545.28,282.76 cw(c617.83,282.76) 566.53,334.06 ccw(c617.83,282.76) C22.1@545.28,282.76 ; 545.28,312.55 cw(c565.45,312.55) 563.48,332.62 ccw(c565.45,312.55) 545.28,312.55
pads on no net: SP1.4 U1.6 U1.7 U2.3 U2.5 U2.7 U2.14 U2.15 U3.0@191.14,396.65 U3.0@191.14,587.6 U3.4 U4.6 U4.7 U6.2 U6.3 U6.4 U6.9 U6.10 U7.2 U7.3 U7.6 U7.14 U7.15 U7.18 U7.21 U7.22 U7.25 U7.32
copper on no net:
  other v2: 118.11,118.11 1456.69,118.11 118.11,866.14 1456.69,866.14

## Polygon pours and split planes (outlines as drawn)
GND on Top Layer "Keep-Out Layer-No Net" (solid, remove dead copper, pour order 24): -47.24,1022.64 1638.78,1022.64 1703.74,957.68 1781.5,879.92 1781.5,-82.68 177.17,-82.68 37.4,-222.44 -170.28,-14.76 -170.28,259.84
GND on Bottom Layer "Keep-Out Layer-No Net" (solid, remove dead copper, pour order 26): -48.23,1045.28 1693.9,1045.28 1738.19,1000.98 1646.65,909.45 1646.65,-67.91 -104.33,-67.91 -108.27,-71.85

## Keep-outs
Keep-Out Layer:
  lines w10: 0,118.11 ccw(c118.11,118.11) 118.11,0 ; 0,119.1 0,867.13 ; 0,866.14 cw(c118.11,866.14) 118.11,984.25 ; 117.13,984.25 1456.69,984.25 cw(c1456.69,866.14) 1574.8,866.14 1574.8,118.11 cw(c1456.69,118.11) 1456.69,0 119.09,0

## Other copper
Top Layer:
  pour cut-out: 684.06,610.24 861.22,610.24 861.22,437.99 684.06,437.99
  pour cut-out: 1377.95,329.72 1545.28,329.72 1545.28,250.98 1377.95,250.98
  pour cut-out: 1412.4,743.11 1550.2,743.11 1550.2,669.29 1413.39,669.29 1412.4,670.28
  pour cut-out: 307.09,987.2 307.09,873.03 346.46,833.66 545.28,833.66 586.61,875 586.61,985.24
  pour cut-out: 1073.82,796.26 1075.79,794.29 1164.37,794.29 1164.37,705.71 1165.35,704.72 1163.39,702.76 1072.83,702.76
  pour cut-out: 1152.56,551.18 1243.11,551.18 1243.11,468.5 1152.56,468.5
  pour cut-out: 1082.68,246.06 1153.54,246.06 1153.54,167.32 1082.68,167.32
  pour cut-out: 795.28,231.3 871.06,231.3 871.06,157.48 795.28,157.48
  region net VBUS: 427.17,203.74 414.37,170.28 399.61,143.7 435.04,104.33 454.72,101.38 461.61,143.7 461.61,189.96 450.79,201.77 449.8,201.77
  region net VBUS: 216.54,551.18 259.84,561.02 263.78,570.87 290.35,575.79 345.47,568.9 345.47,536.42 344.49,535.43 242.13,535.43 216.54,536.42
  text "MAG" at 1427.17,684.06 h40
  text "IMUs" at 1390.75,270.67 h40

## Silkscreen, mask and mechanical layers (free items; w line width, h text height)
Top Overlay:
  text "+" at 292.32,910.43 h40
  text "-" at 554.13,907.48 h40
Bottom Overlay:
  text "SWCLK" at 1078.74,891.73 h40 r90
  text "GND" at 1293.31,887.8 h40 r90
  text "SWIO" at 1145.67,886.81 h40 r90
  text "RX2" at 1272.64,132.87 h40
  text "TX2" at 1105.32,127.95 h40